# Altium PCB InnerMaskFinal.PcbDoc
Units mm, origin at the board's own origin, x right, y up, seen from the top; angles counter-clockwise.
Board outline 10.03 x 10.8 mm, 2 copper layers (Top Layer, Bottom Layer); 1 components, 4 nets, 12 pads, 0 vias.
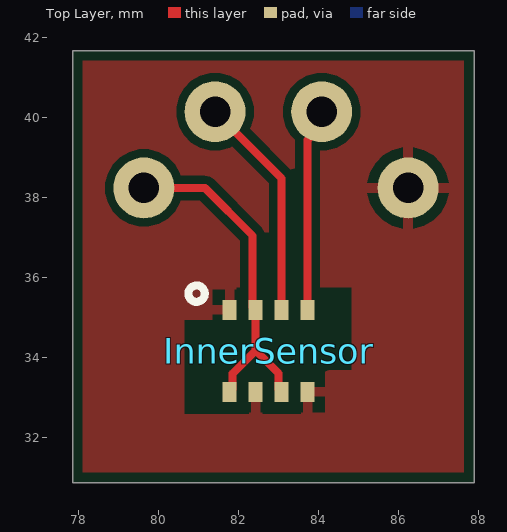
[diagram p0: Top Layer view]
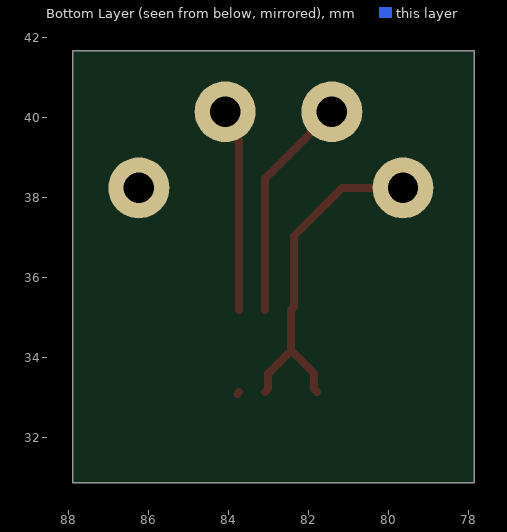
[diagram p1: Bottom Layer view, seen from below]

## Layer stack, top to bottom
Top Solder: solder mask 0.0102, Solder Resist, Dk 3.5
Top Layer: signal copper 0.0356
Dielectric 1: dielectric 0.32, FR-4, Dk 4.8
Bottom Layer: signal copper 0.0356
Bottom Solder: solder mask 0.0102, Solder Resist, Dk 3.5

## Board outline
77.851,30.861 87.884,30.861 87.884,41.656 77.851,41.656

## Design rules (kind name [scope] priority, off if disabled: settings)
Clearance [All] p1: gap=0.2 ignorepadtopadclearanceinfootprint=FALSE except(0.3: SMDPad-Fill SMDPad-Poly SMDPad-Region)
MinimumSolderMaskSliver [All] p1: minsoldermaskwidth=0.09
PolygonConnect [All] p1: connectstyle=Relief reliefconductorwidth=0.254 reliefentries=4 polygonreliefangle="90 Angle" airgapwidth=0.254
RoutingVias [All] p1: holewidth=0.3 width=0.6 viastyle="Through Hole" minholewidth=0.3 minwidth=0.6 maxholewidth=0.3 maxwidth=0.6
SolderMaskExpansion [All] p1: expansion=0.102 istentingtop=FALSE
Width [All] p1: maxlimit=10 minlimit=0.2 preferedwidth=0.2
29 further rules are at their usual default settings.

## Components (designator, comment, footprint, x,y, rotation, side; value= is the part's Value field where it differs from the comment)
InnerSensor "BME280" BME280 81.773,33.129 r90 top

## Footprints (in the part's own frame and the unit in brackets; to place one, negate y for a bottom-side part, rotate by r counter-clockwise, add the part's x,y. Pads: shape width x height; smd on the part's side, far side on the other; paste and mask are expansions set on the pad)
BME280 [mm]
  rect 0.5x0.35 smd: 1(2.05,0) 2(2.05,-0.65) 3(2.05,-1.3) 4(2.05,-1.95) 5(0,-1.95) 6(0,-1.3) 7(0,-0.65) 8(0,0)
  silkscreen extent 2.25,0.62 2.66,1.03

## Part data
InnerSensor: "Hygrometer", Manufacturer_Name="Bosch Sensortec", Mouser Part Number=262-BME280, Arrow Part Number=BME280, Arrow Price/Stock=https://www.arrow.com/en/products/bme280/bosch, Datasheet Link=http://ae-bst.resource.bosch.com/media/products/dokumente/bme280/BST-BME280_DS001-11.pdf, Manufacturer_Part_Number=BME280, Mouser Price/Stock=https://www.mouser.co.uk/ProductDetail/Bosch-Sensortec/BME280?qs=2OnyuXx6vpj2fK9HX7qb3g%3D%3D

## Free pads (board coordinates)
  round 1.524 hole 0.762: 1(79.629,38.227) 2(81.407,40.132) 3(84.074,40.132) 4(86.233,38.227)

## Nets (pads, with @x,y where several pads share a name; then routed paths per layer and width w, separated by ;. In a path a pad name is that pad's centre, name@x,y a point inside that pad or via, vN(x,y) a via of type N, cw(c..) or ccw(c..) an arc to the next point about the centre after c; other vN are vias at no path point)
3.3V: InnerSensor.2 InnerSensor.6 InnerSensor.8 pad.1 | length 8.7
  Top Layer w0.2: pad.1 81.153,38.227 82.348,37.032 82.348,35.254 InnerSensor.2 82.423,34.163 ; InnerSensor.8 81.848,33.204 81.848,33.588 82.423,34.163 ; InnerSensor.6 82.998,33.204 82.998,33.588 82.423,34.163
GND: InnerSensor.1 InnerSensor.5 InnerSensor.7 pad.4 | length 0.1
  Top Layer w0.2: InnerSensor.5 InnerSensor.5@83.771,33.081
SCK: InnerSensor.4 pad.3 | length 5.1
  Top Layer w0.2: InnerSensor.4 83.723,39.423 84.074,39.774 pad.3
SDI: InnerSensor.3 pad.2 | length 5.6
  Top Layer w0.2: pad.2 83.073,38.466 InnerSensor.3

## Polygon pours and split planes (outlines as drawn)
GND on Top Layer "GND_L01_P000" (solid, remove dead copper, pour order 0): 78.105,41.402 87.63,41.402 87.63,31.115 78.105,31.115

## Other copper
Top Layer:
  pour cut-out: 84.201,34.925 84.201,35.726 84.812,35.726 84.812,33.679 81.298,33.679 81.298,32.579 80.645,32.579 80.645,34.925